# Altium PCB PCB1.PcbDoc
Units mil, origin at the board's own origin, x right, y up, seen from the top; angles counter-clockwise.
Board outline 2635 x 1850 mil, 2 copper layers (Top Layer, Bottom Layer); 36 components, 49 nets, 170 pads, 36 vias.
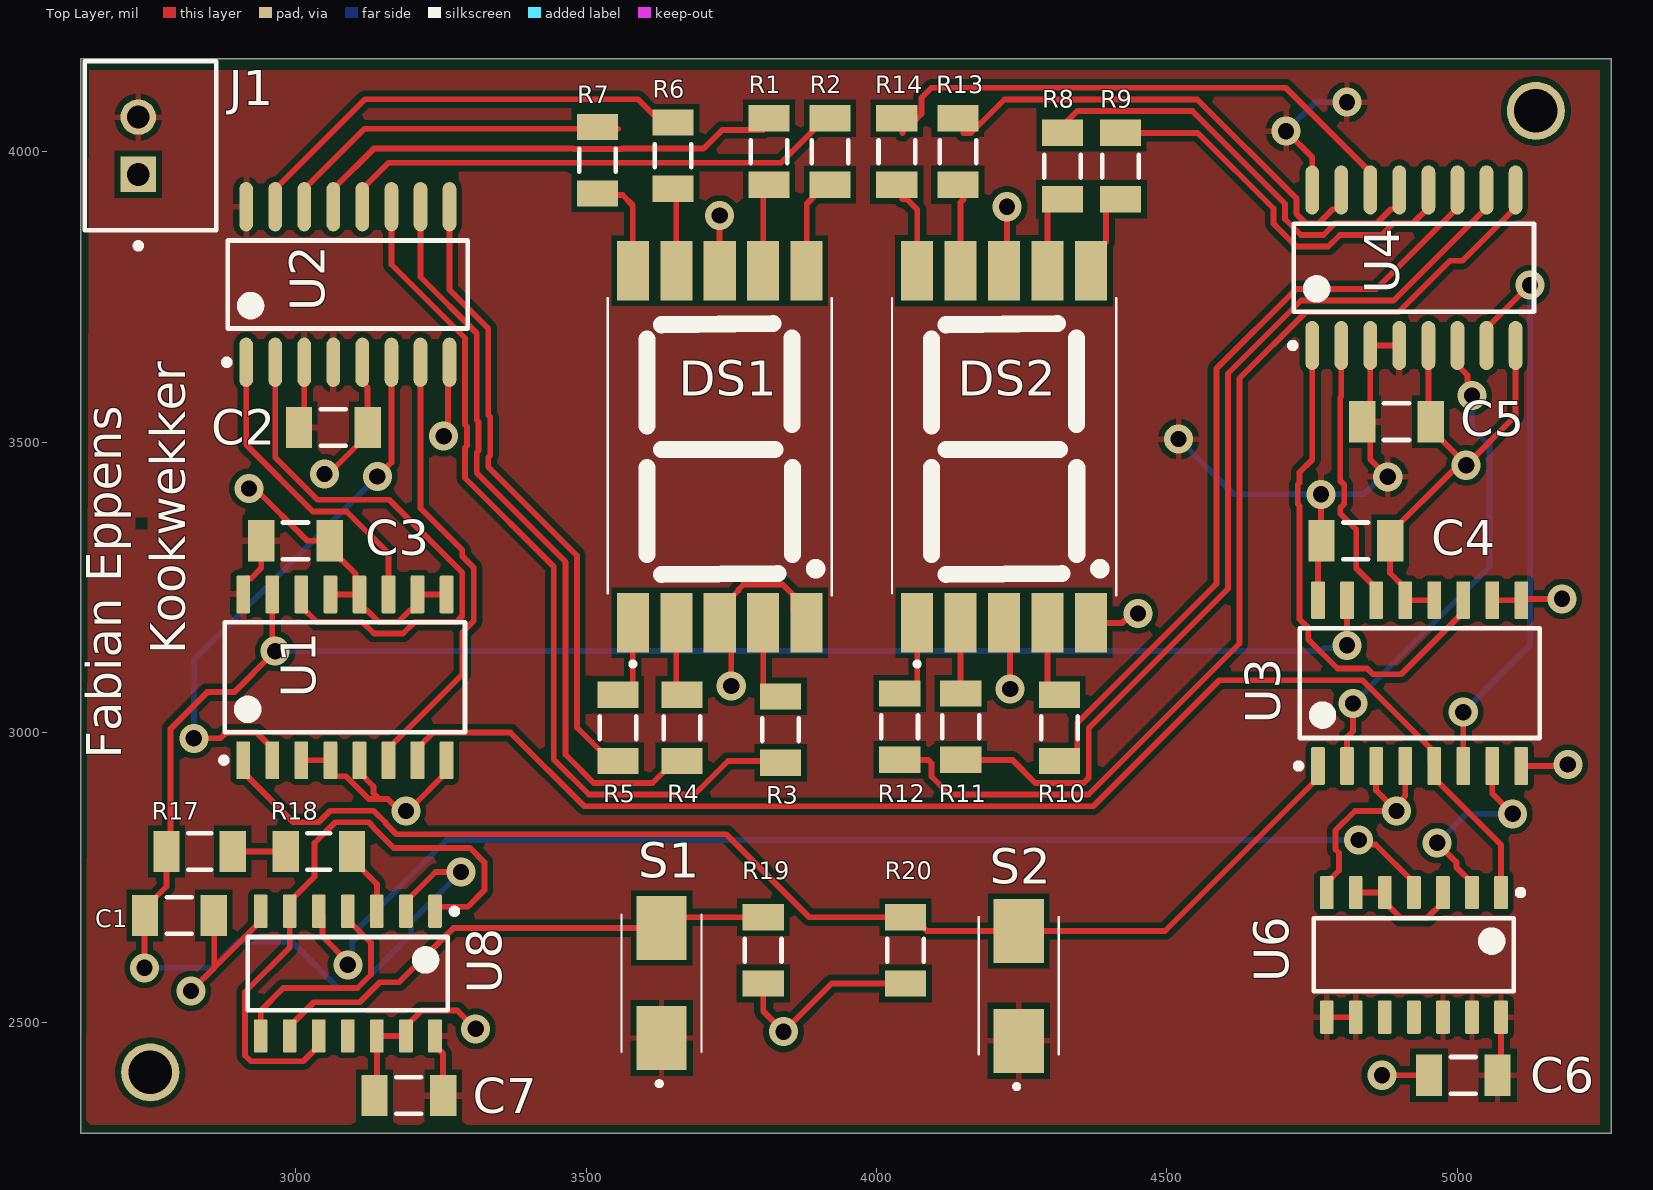
[diagram p0: Top Layer view]
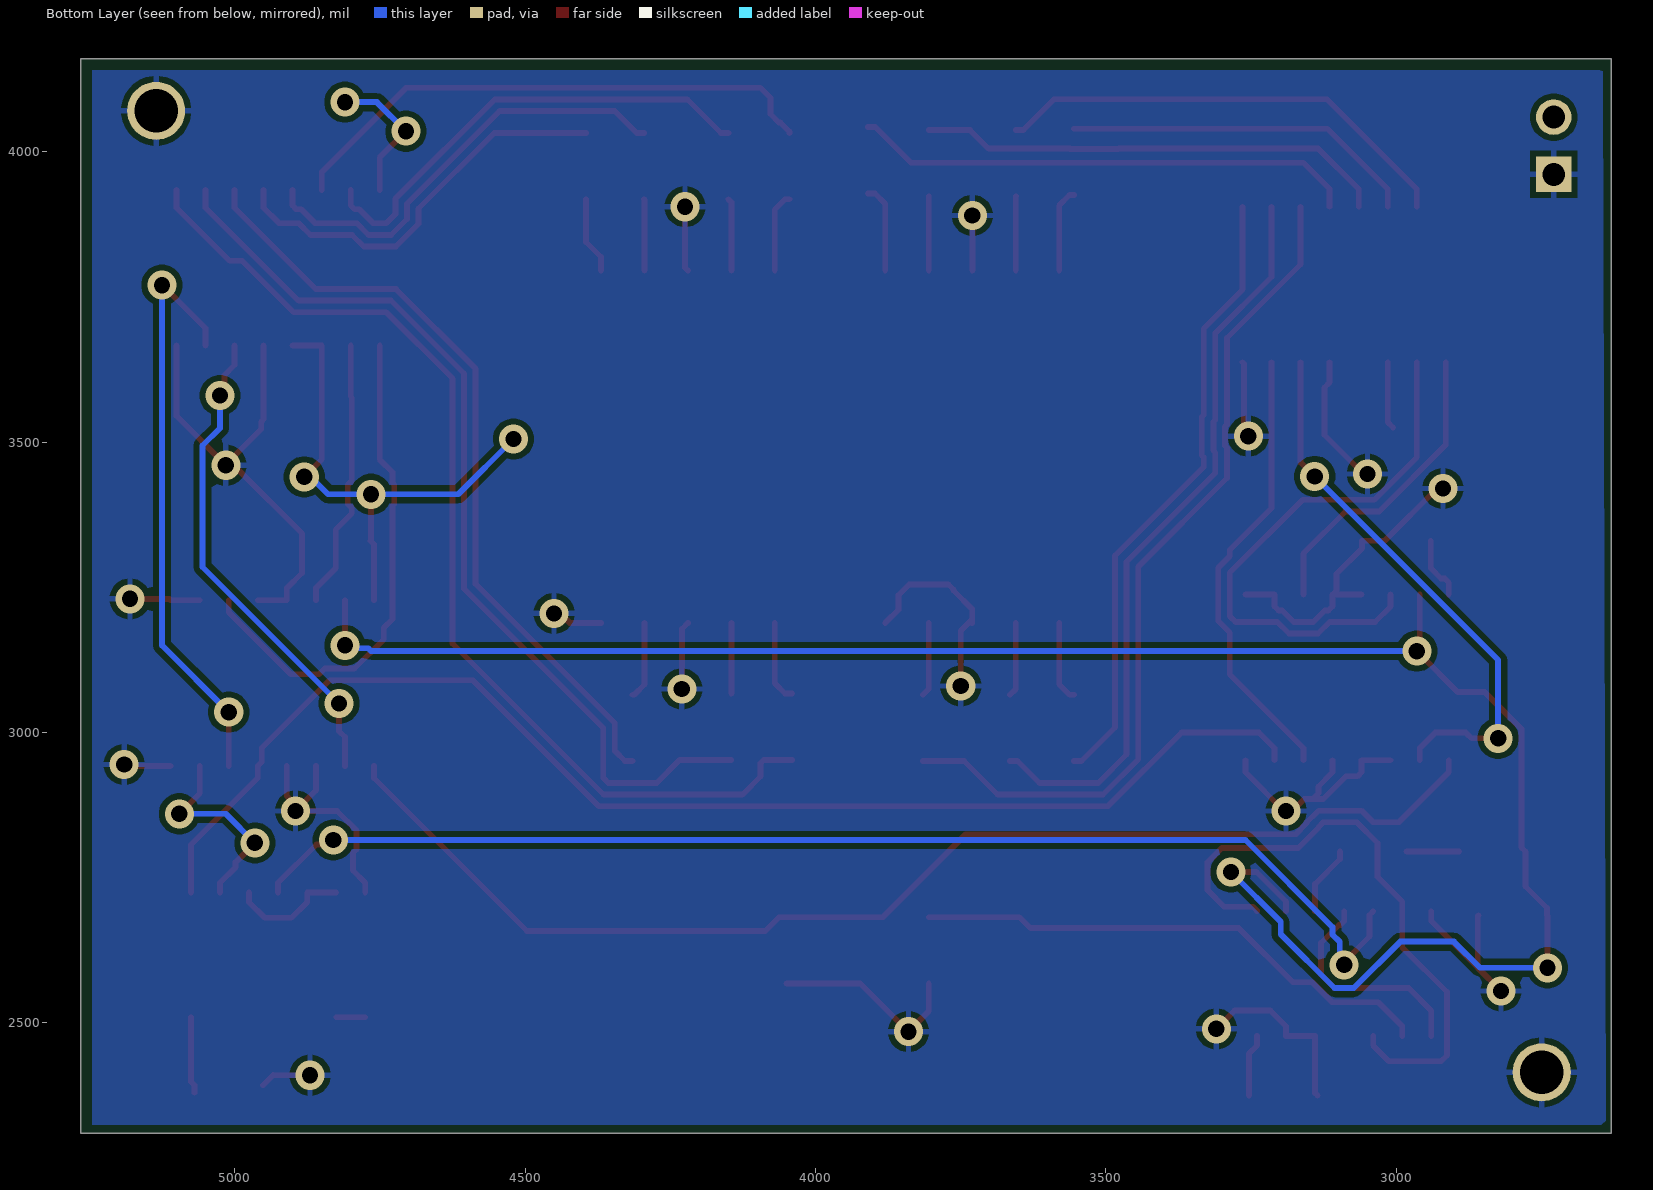
[diagram p1: Bottom Layer view, seen from below]

## Layer stack, top to bottom
Top Solder: solder mask 0.4, Solder Resist, Dk 3.5
Top Layer: signal copper 1.4
Dielectric 1: dielectric 12.6, FR-4, Dk 4.8
Bottom Layer: signal copper 1.4
Bottom Solder: solder mask 0.4, Solder Resist, Dk 3.5

## Board outline
2630,2310 2630,4160 5265,4160 5265,2310

## Design rules (kind name [scope] priority, off if disabled: settings)
Clearance [All] p1: gap=10 ignorepadtopadclearanceinfootprint=FALSE
PolygonConnect [All] p1: connectstyle=Relief reliefconductorwidth=10 reliefentries=4 polygonreliefangle="90 Angle" airgapwidth=10
RoutingVias [All] p1: holewidth=28 width=50 viastyle="Through Hole" minholewidth=28 minwidth=50 maxholewidth=28 maxwidth=50
SolderMaskExpansion [All] p1: expansion=4 istentingtop=FALSE
SupplyNets "Schematic Supply Nets_1" [InNet('Vdd')] p1: voltage=0.000
SupplyNets "Schematic Supply Nets" [InNet('GND')] p2: voltage=0.000
Width [All] p1: maxlimit=10 minlimit=10 preferedwidth=10
30 further rules are at their usual default settings.

## Classes and differential pairs
component class KookWekker: J1 U9
component class Logic: C1 C3 C4 C6 C7 R17 R18 R19 R20 S1 S2 U1 U3 U6 U8
component class Display: C2 C5 DS1 DS2 R1 R2 R3 R4 R5 R6 R7 R8 R9 R10 R11 R12 R13 R14 U2 U4

## Components (designator, comment, footprint, x,y, rotation, side; value= is the part's Value field where it differs from the comment)
C1 "100µF" C1206 2800,2685 r0 top
C2 "100nF" C1206 3065,3525 r180 top
C3 "100nF" C1206 3000,3330 r0 top
C4 "100nF" C1206 4825,3330 r0 top
C5 "100nF" C1206 4895,3535 r180 top
C6 "100nF" C1206 5010,2410 r0 top
C7 "100nF" C1206 3195,2375 r0 top
DS1 "HDSM-433C" HDSM433C 3730.2,3491.85 r0 top
DS2 "HDSM-433C" HDSM433C 4219.61,3491.85 r0 top
J1 "B2B-XH-A(LF)(SN)" FP-B2B-XH-A_LF_SN-MFG 2750,4010 r90 top
R1 "330" R1206 3815,4000 r270 top
R2 "330" R1206 3920,4000 r270 top
R3 "330" R1206 3835,3005 r90 top
R4 "330" R1206 3665,3007.91 r90 top
R5 "330" R1206 3555,3007.91 r90 top
R6 "330" R1206 3650,3992.91 r270 top
R7 "330" R1206 3520,3985 r270 top
R8 "330" R1206 4320,3975 r270 top
R9 "330" R1206 4420,3975 r270 top
R10 "330" R1206 4315,3007.91 r90 top
R11 "330" R1206 4145,3010 r90 top
R12 "330" R1206 4040,3010 r90 top
R13 "330" R1206 4140,4000 r270 top
R14 "330" R1206 4035,4000 r270 top
R17 "1K" R1206 2835,2795 r180 top
R18 "1K" R1206 3040,2795 r180 top
R19 "10K" R1206 3805,2625 r270 top
R20 "10K" R1206 4050,2625 r270 top
S1 "START" 1478731 3630,2555 r90 top
S2 "PRESET" 1478731 4245,2550 r90 top
U1 "CD4510BNSR" NS0016A_N 3085,3095 r90 top
U2 "CD4511BNSR" TI-NS16_N 3090,3771.14 r90 top
U3 "CD4510BNSR" NS0016A_N 4935,3085 r90 top
U4 "CD4511BNSR" TI-NS16_N 4925,3800 r90 top
U6 "CD4001" D0014A_N 4925,2617.28 r270 top
U8 "CD4093BM" D0014A_N 3090,2585 r270 top

## Footprints (in the part's own frame and the unit in brackets; to place one, negate y for a bottom-side part, rotate by r counter-clockwise, add the part's x,y. Pads: shape width x height; smd on the part's side, far side on the other; paste and mask are expansions set on the pad)
1478731 [mm]
  rect 2.8x2.2 smd: 1(-2.05,0) 2(2.75,0)
  silkscreen extent -4.15,-1.75 3.35,1.75, body extent -3.15,-1.75 3.65,1.75, height 5.2
C1206 [mm] "Chip Capacitor, Body 3.2x1.6mm, Height 1.7mm, IPC Medium Density"
  rect 1.15x1.8 smd: 1(-1.5,0) 2(1.5,0)
  silkscreen extent -0.55,-0.8 0.55,0.8, body extent -1.7,-0.9 1.7,0.9, height 1.7
D0014A_N [mm] "SOIC, 14-Leads, Body 8.75x4mm, Pitch 1.27mm, IPC Medium Density"
  rrect17% 1.45x0.6 smd: 1(-2.725,3.81) 2(-2.725,2.54) 3(-2.725,1.27) 4(-2.725,0) 5(-2.725,-1.27) 6(-2.725,-2.54) 7(-2.725,-3.81) 8(2.725,-3.81) 9(2.725,-2.54) 10(2.725,-1.27) 11(2.725,0) 12(2.725,1.27) 13(2.725,2.54) 14(2.725,3.81)
  silkscreen extent -2.85,-4.38 1.6,4.79, body extent -3.02,-4.32 3.02,4.32, height 1.59
FP-B2B-XH-A_LF_SN-MFG [mm]
  rect 1.55x1.55 hole 1 paste-2539.97 mask+0: 1(-1.25,0.525)
  round 1.55 hole 1 paste-2539.97 mask+0: 2(1.25,0.525)
  silkscreen extent -4.5,-2.88 3.7,2.88, body extent -3.8,-2.98 3.8,2.98, height 0.25
HDSM433C [mm]
  rect 1.4x2.6 smd: 1(-3.8,-7.7) 2(-1.9,-7.7) 3(0,-7.7) 4(1.9,-7.7) 5(3.8,-7.7) 6(3.8,7.7) 7(1.9,7.7) 8(0,7.7) 9(-1.9,7.7) 10(-3.8,7.7)
  silkscreen extent -4.9,-9.6 4.9,6.5, body extent -4.95,-6.48 4.95,6.48, height 3.75
NS0016A_N [mm] "SOIC,16-Leads,Body 10.5x5.6mm,Pitch 1.27mm,IPC Medium Density"
  rrect17% 1.65x0.6 smd: 1(-3.625,4.445) 2(-3.625,3.175) 3(-3.625,1.905) 4(-3.625,0.635) 5(-3.625,-0.635) 6(-3.625,-1.905) 7(-3.625,-3.175) 8(-3.625,-4.445) 9(3.625,-4.445) 10(3.625,-3.175) 11(3.625,-1.905) 12(3.625,-0.635) 13(3.625,0.635) 14(3.625,1.905) 15(3.625,3.175) 16(3.625,4.445)
  silkscreen extent -3.75,-5.25 2.4,5.42, body extent -2.8,-5.25 2.8,5.25, height 2
R1206 [mm] "Chip Resistor, Body 3.2x1.6mm, IPC Medium Density"
  rect 1.15x1.8 smd: 1(-1.45,0) 2(1.45,0)
  silkscreen extent -0.5,-0.8 0.5,0.8, body extent -1.67,-0.87 1.67,0.87, height 0.75
TI-NS16_N [mm] "SOP, 16-Leads, Body 10.2x5.3mm, Pitch 1.27mm, IPC Medium Density"
  oval 2.15x0.6 smd: 1(-3.4,4.445) 2(-3.4,3.175) 3(-3.4,1.905) 4(-3.4,0.635) 5(-3.4,-0.635) 6(-3.4,-1.905) 7(-3.4,-3.175) 8(-3.4,-4.445) 9(3.4,-4.445) 10(3.4,-3.175) 11(3.4,-1.905) 12(3.4,-0.635) 13(3.4,0.635) 14(3.4,1.905) 15(3.4,3.175) 16(3.4,4.445)
  silkscreen extent -3.52,-5.25 1.92,5.42, body extent -2.8,-5.25 2.8,5.25, height 2

## Part data
C1 C2 C3 C4 C5 C6 C7: library part Capacitor_1206, "SMD Capacitor 1206", LatestRevisionDate=03-11-2016, LatestRevisionNote=Creation, PackageDescription="Chip Capacitor, Body 3.2x1.6mm, Height 1.7mm, IPC Medium Density", PackageReference=C1206, Published=03-11-2016, Publisher=Windesheim
DS1 DS2: "Display", Manufacturer_Name="Avago Technologies", Mouser Part Number=630-HDSM-433C, RS Part Number=1783057, Datasheet Link=https://docs.broadcom.com/docs/AV02-0708EN, Height=4mm, Manufacturer_Part_Number=HDSM-433C, Mouser Price/Stock=https://www.mouser.com/Search/Refine.aspx?Keyword=630-HDSM-433C, RS Price/Stock=http://uk.rs-online.com/web/p/products/1783057
J1: library part CMP-2000-05888-3, "CONN HEADER VERT 2POS 2.5MM", Color=Natural, Contact Resistance=20mR, Current Rating=3A, Housing Color=White, Insulation Resistance=1GR, Max Operating Temperature=85°C, Max Voltage Rating (AC)=250V, Min Operating Temperature=-25°C, Connector Type="Male Pin", Contact Material=Brass, Contact Plating=Tin, Contact Type="Male Pin", Depth=5.75mm, Fastening Type=Detent, Housing Material=Polyamide, Lead Free="Lead Free", Lead Pitch=2.5mm, Length=7.4mm, Max Current Rating=3A, Max Voltage Rating (DC)=250V, Mount="Through Hole", Number of Contacts=2, Number of Positions=2, Number of Rows=1, Orientation=Straight, Packaging=Bulk, Pitch=2.5mm, REACH SVHC="No SVHC", Series=XH, Termination=Solder, Voltage Rating=250V, Voltage Rating (AC)=250V, Wire/Cable Gauge=22AWG
R1 R2 R3 R4 R5 R6 R7 R8 R9 R10 R11 R12 R13 R14 R17 R18 R19 R20: library part Resistor_1206, "SMD Resistor 1206", LatestRevisionDate=03-11-2016, LatestRevisionNote=Creation, PackageDescription="Chip Resistor, Body 3.2x1.6mm, IPC Medium Density", PackageReference=R1206, Published=03-11-2016, Publisher=Windesheim
S1 S2: library part Switch, "Switch", Manufacturer_Name="TE Connectivity", Manufacturer_Part_Number=147873-1, Mouser Part Number=506-147873-1, Datasheet Link=https://componentsearchengine.com/Datasheets/1/147873-1.pdf, Height=5mm, Mouser Price/Stock=https://www.mouser.com/Search/Refine.aspx?Keyword=506-147873-1
U1 U3: "CMOS Presettable BCD Up/Down Counter, NS0016A, LARGE T&R", F @ Nom Voltage(Max)(Mhz)=8, Generic Part Number=CD4510B, ICC @ Nom Voltage(Max)(mA)=0.03, Manufacturer="Texas Instruments", Operating Temperature Range(C)="-55 to 125", Rating=Catalog, tpd @ Nom Voltage(Max)(ns)=200, Voltage(Nom)(V)=5,10,15, Bits(#)=4, DatasheetVersion=SCHS071B, Function=Counter, Input Type=CMOS, Inputs=1, Output Drive (IOL/IOH)(Max)(mA)=1.5/-1.5, Output Type=CMOS, PackageReference=NS0016A, Schmitt Trigger=No, Technology Family=CD4000, Type=Other, VCC(Max)(V)=18, VCC(Min)(V)=3
U2 U4: "CMOS BCD-to-7-Segment LED Latch / Decoder / Driver, 3 to 18 V, -55 to 125 degC, 16-pin SOP (NS16), Green (RoHS & no Sb/Br)", Manufacturer="Texas Instruments", Rating=Military, ComponentLink1Description="Manufacturer URL", ComponentLink1URL=http://www.ti.com/, ComponentLink2Description=Datasheet, ComponentLink2URL=http://www.ti.com/general/docs/lit/getliterature.tsp?genericPartNumber=CD4511B&fileType=pdf, ComponentLink3Description="Package Specification", ComponentLink3URL=http://www.ti.com/litv/pdf/msop002a, DatasheetVersion=SCHS072B, Eco-Plan="Green (RoHS & no Sb/Br)", Mounting Technology="Surface Mount", PackageDescription="16-Pin Plastic Small Outline, Body 10.20 x 5.30 mm, Pitch 1.27 mm", PackageReference=NS16, PackageVersion=4040062/C, PartNumber=CD4511BNSR, SubFamily="Discrete Segment LED Driver", Vin(Max)(V)=18, Vin(Min)(V)=3
U6: "CMOS Quad 2-Input NOR Schmitt Triggers, D0014A, TUBE", F @ Nom Voltage(Max)(Mhz)=8, Generic Part Number=CD4093B, ICC @ Nom Voltage(Max)(mA)=0.06, Manufacturer="Texas Instruments", Operating Temperature Range(C)="-55 to 125", Rating=Catalog, Voltage(Nom)(V)=10, Bits(#)=4, Code_JEDEC=MS-012, DatasheetVersion=SCHS115D, Input Type=CMOS, Output Drive (IOL/IOH)(Max)(mA)=1.5/-1.5, Output Type=CMOS, PackageReference=D0014A, Schmitt Trigger=Yes, Technology Family=CD4000, VCC(Max)(V)=18, VCC(Min)(V)=3
U8: "CMOS Quad 2-Input NAND Schmitt Triggers, D0014A, TUBE", F @ Nom Voltage(Max)(Mhz)=8, Generic Part Number=CD4093B, ICC @ Nom Voltage(Max)(mA)=0.06, Manufacturer="Texas Instruments", Operating Temperature Range(C)="-55 to 125", Rating=Catalog, Voltage(Nom)(V)=10, Bits(#)=4, Code_JEDEC=MS-012, DatasheetVersion=SCHS115D, Input Type=CMOS, Output Drive (IOL/IOH)(Max)(mA)=1.5/-1.5, Output Type=CMOS, PackageReference=D0014A, Schmitt Trigger=Yes, Technology Family=CD4000, VCC(Max)(V)=18, VCC(Min)(V)=3

## Free pads (board coordinates)
  round 100 hole 75: MNT(2750,2415) MNT(5135,4070)

## Via types
v1: diameter 50, hole 28, Top Layer to Bottom Layer, 36 vias

## Nets (pads, with @x,y where several pads share a name; then routed paths per layer and width w, separated by ;. In a path a pad name is that pad's centre, name@x,y a point inside that pad or via, vN(x,y) a via of type N, cw(c..) or ccw(c..) an arc to the next point about the centre after c; other vN are vias at no path point)
CarryM: U3.7 U6.2 | length 357.8
  Top Layer w10: v1(4965,2810) 4998.13,2776.87 4998.13,2768.17 5025,2741.3 U6.2 ; U3.7 5060,2895 v1(5095,2860)
  Bottom Layer w10: v1(4965,2810) 5015,2860 v1(5095,2860)
CarryOUT: U1.7 U3.5 U6.1 | length 2264.8
  Top Layer w10: U1.7 3210,2972.95 3236.81,2999.76 3370.21,2999.76 3496.79,2873.19 4373.21,2873.19 4590.03,3090 4836.57,3090 4953.19,2973.38 4953.19,2949.09 U3.5 4960,2921.61 5075,2806.61 U6.1
Clock: C1.1 R17.2 U1.15 U3.15 U8.2 | length 3513.1
  Top Layer w10: v1(2740,2595) 2740,2684.06 C1.1 2740.94,2697.8 2777.91,2734.76 R17.2 2785,2802.09 2785,3006.57 2847.89,3069.46 2894.46,3069.46 2960,3135 U1.15 ; U8.2 3190,2709.02 3240.98,2760 v1(3285,2760) ; v1(4810,3150) U3.15
  Bottom Layer w10: v1(2740,2595) 2856.2,2595 2901.2,2640 2993.43,2640 3073.43,2560 3106.57,2560 3199.32,2652.75 3199.32,2674.32 v1(3285,2760) ; v1(2965,3140) 2965.12,3140.12 4765,3140.12 4770,3145.12 4805.12,3145.12 v1(4810,3150)
GND: C1.2 C2.1 C3.2 C4.2 C5.1 C6.1 C7.1 DS1.3 DS1.5 DS1.8 DS2.3 DS2.5 DS2.8 J1.1 pad.MNT R19.2 R20.2 U1.3 U1.4 U1.5 U1.8 U1.9 U1.10 U1.12 U1.13 U2.5 U2.8 U3.3 U3.4 U3.8 U3.9 U3.10 U3.12 U3.13 U4.5 U4.8 U6.7 U8.7 U8.12 U8.13 | length 4626.2
  Top Layer w10: v1(2820,2555) 2860,2595 2860,2595.55 ; C1.2 2860,2684.06 2860,2595.55 ; v1(2920,3420) 2930.23,3420 3020.23,3330 C3.2 3059.06,3317.2 3103.19,3273.07 3103.19,3244.53 U1.12 ; U8.7 2940,2675.55 2860,2595.55 ; U1.3 U1.4 3060,2931.61 3066.81,2924.8 3086.81,2924.8 3126.18,2885.43 3143.54,2885.43 3158.74,2885.43 3179.18,2865 3193.39,2865 3260,2931.61 U1.8 ; v1(3050,3445) 3056.85,3445 3124.06,3512.2 C2.1 3124.06,3594.03 3115,3603.09 U2.5 ; U1.13 U1.12 ; U1.5 3110,2931.61 3134.37,2907.24 3134.37,2895.63 3143.54,2886.46 ; C7.1 3140,2379.06 U8.12 U8.13 3190,2494.45 3216.81,2521.26 3278.74,2521.26 v1(3310,2490) ; v1(3255,3510) 3262.39,3517.39 3262.39,3634.68 U2.8 ; U1.9 U1.10 3210,3217.05 3203.19,3210.24 3196.85,3210.24 3176.85,3190.24 3143.15,3190.24 3123.15,3210.24 3116.81,3210.24 3110,3217.05 U1.12 ; v1(3730,3890) 3730,3795.2 DS1.8 ; DS1.3 DS1.3@3730.2,3194.8 ; v1(3750,3080) 3750,3175 DS1.3@3730.2,3194.8 ; R19.2 3805,2520 v1(3840,2485) 3922.91,2567.91 R20.2 ; DS1.5 3857.24,3211.26 3857.24,3236.41 3838.77,3254.88 3771.23,3254.88 3762.44,3246.1 3762.44,3244.57 3730.2,3212.32 DS1.3@3730.2,3194.8 ; DS2.3 4230,3178.31 v1(4230,3075) ; DS2.8 4224.57,3799.96 v1(4224.57,3905) ; DS2.5 4422.88,3188.7 4439.18,3205 v1(4450,3205) ; U6.7 4775,2741.3 4795.95,2762.25 4795.95,2792.48 4790,2798.43 4790,2831.57 4823.43,2865 v1(4895,2865) ; U3.3 4860,2900 v1(4895,2865) ; v1(4870,2410) 4933.74,2410 4950.94,2392.8 C6.1@4933.31,2410.43 ; U3.4 4910,2890.82 4895,2875.82 v1(4895,2865) ; U4.5 4950,3539.05 C5.1 4954.06,3522.2 5015,3461.26 v1(5015,3460) ; U3.12 U3.13 4910,3248.39 4884.06,3274.33 4884.06,3342.8 4993.61,3452.35 5007.35,3452.35 v1(5015,3460) ; U3.10 U3.9 5112.28,3230 v1(5180,3230) ; U4.8 5100,3545 v1(5015,3460) ; U3.8 5182.28,2942.28 5185,2945 v1(5190,2945)
  Bottom Layer w10: v1(3255,3510) 3255,3500 v1@3265,3510
  other v1: 3190,2865
NetDS1_1: DS1.1 R5.2 | length 139
  Top Layer w10: R5.2 3562.95,3065 3580.59,3082.64 DS1.1
NetDS1_2: DS1.2 R4.2 | length 127.7
  Top Layer w10: DS1.2 3655.39,3074.61 R4.2
NetDS1_4: DS1.4 R3.2 | length 127.8
  Top Layer w10: DS1.4 3805,3075 R3.2@3815,3065
NetDS1_6: DS1.6 R2.2 | length 152.8
  Top Layer w10: DS1.6 3879.8,3910.28 3897.44,3927.91 R2.2@3910,3927.91
NetDS1_7: DS1.7 R1.2 | length 127.9
  Top Layer w10: DS1.7 R1.2@3805,3922.91
NetDS1_9: DS1.9 R6.2 | length 128.1
  Top Layer w10: R6.2@3655,3922.91 3655.39,3922.52 DS1.9
NetDS1_10: DS1.10 R7.2 | length 145.3
  Top Layer w10: R7.2@3555,3925 3562.95,3925 3580.59,3907.36 DS1.10
NetDS2_1: DS2.1 R12.2 | length 141.3
  Top Layer w10: R12.2 4052.36,3067.09 4070,3084.72 DS2.1
NetDS2_2: DS2.2 R11.2 | length 121.7
  Top Layer w10: DS2.2 4144.8,3067.28 R11.2
NetDS2_4: DS2.4 R10.2 | length 134
  Top Layer w10: DS2.4 4294.41,3082.64 4312.05,3065 R10.2
NetDS2_6: DS2.6 R9.2 | length 133.6
  Top Layer w10: DS2.6 4369.21,3818.62 4395,3844.41 R9.2@4395,3917.91
NetDS2_7: DS2.7 R8.2 | length 123.2
  Top Layer w10: DS2.7 4294.41,3917.32 R8.2@4295,3917.91
NetDS2_9: DS2.9 R13.2 | length 125.1
  Top Layer w10: DS2.9 4144.8,3912.72 4150,3917.91
NetDS2_10: DS2.10 R14.2 | length 137.6
  Top Layer w10: 4045,3917.91 4052.36,3917.91 4070,3900.28 DS2.10
NetR1_1: R1.1 U2.13 | length 813
  Top Layer w10: U2.13 3065,3935.51 3134.49,4005 3477.8,4005 3478.35,4004.45 3561.65,4004.45 3562.2,4005 3702.2,4005 3734.28,4037.09 R1.1@3805,4037.09
NetR2_1: R2.1 U2.12 | length 869.7
  Top Layer w10: U2.12 3115,3935.51 3160.04,3980.55 3835.67,3980.55 3897.2,4042.09 R2.1@3910,4042.09
NetR3_1: R3.1 U2.11 | length 1489.1
  Top Layer w10: U2.11 3165,3805.71 3291.81,3678.9 3291.81,3529.76 3295,3526.57 3295,3493.43 3291.81,3490.24 3291.81,3438.19 3444.57,3285.43 3444.57,2953.69 3505.07,2893.19 3686.65,2893.19 3744.28,2950.83 R3.1@3815,2950.83
NetR4_1: R4.1 U2.10 | length 1285.3
  Top Layer w10: U2.10 3215,3784 3311.81,3687.18 3311.81,3538.04 3315,3534.85 3315,3485.15 3311.81,3481.96 3311.81,3446.47 3464.57,3293.72 3464.57,2961.98 3513.35,2913.19 3614.57,2913.19 3652.2,2950.83 R4.1
NetR5_1: R5.1 U2.9 | length 1084.4
  Top Layer w10: U2.9 3265,3762.28 3331.81,3695.47 3331.81,3546.33 3335,3543.14 3335,3476.86 3331.81,3473.67 3331.81,3457.19 3484.57,3304.43 3484.57,3008.46 3542.2,2950.83 R5.1
NetR6_1: R6.1 U2.15 | length 806.4
  Top Layer w10: U2.15 2965,3935.51 3119.49,4090 3589.29,4090 3642.2,4037.09 R6.1@3655,4037.09
NetR7_1: R7.1 U2.14 | length 613.4
  Top Layer w10: U2.14 3015,3935.51 3118.66,4039.17 3520,4039.17 R7.1@3555,4039.17
NetR8_1: R8.1 U4.13 | length 772
  Top Layer w10: R8.1@4295,4032.09 4307.8,4032.09 4345.43,4069.72 4543.71,4069.72 4703.19,3910.24 4703.19,3883.96 4730.61,3856.54 4769.39,3856.54 4789.39,3876.54 4861.11,3876.54 4885.31,3900.74 4893.71,3900.74 4900,3907.03 U4.13
NetR9_1: R9.1 U4.12 | length 709.6
  Top Layer w10: R9.1@4395,4032.09 4553.06,4032.09 4683.19,3901.96 4683.19,3875.67 4722.33,3836.54 4777.67,3836.54 4797.67,3856.54 4869.39,3856.54 4889.39,3876.54 4923.19,3876.54 4950,3903.35 U4.12
NetR10_1: R10.1 U4.11 | length 1355
  Top Layer w10: R10.1 4327.8,2950.83 4345.43,2968.46 4345.43,3016.15 4585,3255.72 4585,3626.14 4722.33,3763.46 4860.12,3763.46 5000,3903.35 U4.11
NetR11_1: R11.1 U4.10 | length 1629.4
  Top Layer w10: R11.1 4233.63,2952.91 4273.35,2913.19 4356.65,2913.19 4365.43,2921.98 4365.43,3007.86 4605,3247.43 4605,3383.38 4605,3617.85 4730.61,3743.46 4869.39,3743.46 4890.12,3743.46 5050,3903.35 U4.10
NetR12_1: R12.1 U4.9 | length 1814.4
  Top Layer w10: R12.1 4088.71,2952.91 4094.57,2947.06 4094.57,2924.06 4125.44,2893.19 4364.93,2893.19 4625,3153.26 4625,3609.57 4738.9,3723.46 4861.11,3723.46 4898.4,3723.46 4987.04,3812.1 5008.76,3812.1 5100,3903.35 U4.9
NetR13_1: R13.1 U4.15 | length 817
  Top Layer w10: 4150,4032.09 4162.8,4032.09 4220.43,4089.72 4551.99,4089.72 4723.19,3918.53 4723.19,3892.24 4738.89,3876.54 4761.11,3876.54 4785.31,3900.74 4793.71,3900.74 4800,3907.03 U4.15
NetR14_1: R14.1 U4.14 | length 945.5
  Top Layer w10: 4045,4032.09 4045,4034.29 4060.43,4049.72 4062.64,4049.72 4077.64,4064.72 4077.64,4092.64 4094.72,4109.72 4704.65,4109.72 4850,3964.37 U4.14
NetR17_1: R17.1 R18.2 | length 90.8
  Top Layer w10: R17.1 R18.2
NetR18_1: R18.1 U8.3 | length 120.5
  Top Layer w10: R18.1 3097.09,2782.2 3140,2739.29 U8.3
NetU1_2: U1.2 U2.6 | length 958.9
  Top Layer w10: v1(2825,2990) 2870.82,2990 2880.59,2999.76 2933.19,2999.76 2960,2972.95 U1.2 ; v1(3140.74,3440.74) 3165,3465 U2.6
  Bottom Layer w10: v1(2825,2990) 2825,3125 v1(3140.74,3440.74)
NetU1_6: U1.6 U2.7 | length 783.8
  Top Layer w10: U1.6 3160,2972.95 3286.81,3099.76 3286.81,3171.92 3306.81,3191.92 3306.81,3283.52 3286.81,3303.52 3286.81,3314.22 3215,3386.03 U2.7
NetU1_11: U1.11 U2.1 | length 535.1
  Top Layer w10: U2.1 2915,3495.15 3029.71,3380.43 3087.91,3380.43 3160,3308.34 U1.11
NetU1_14: U1.14 U2.2 | length 972.1
  Top Layer w10: U2.2 2965,3473.43 3037.69,3400.74 3161.31,3400.74 3286.81,3275.23 3286.81,3200.2 3276.85,3190.24 3205.13,3190.24 3185.13,3170.24 3134.87,3170.24 3114.87,3190.24 3036.81,3190.24 3010,3217.05 U1.14
NetU3_2: U3.2 U4.6 | length 848.1
  Top Layer w10: U3.2 4810,2992.24 4820,3002.24 v1(4820,3050) ; U4.6 5000,3632.41 5017.35,3615.06 5017.35,3587.65 v1(5025,3580)
  Bottom Layer w10: v1(4820,3050) 5055,3285 5055,3493.8 5025,3523.8 v1(5025,3580)
NetU3_6: U3.6 U4.7 | length 1010.8
  Top Layer w10: U3.6 v1(5010,3035) ; U4.7 5050,3695.83 5124.17,3770 v1(5125,3770)
  Bottom Layer w10: v1(5010,3035) 5125,3150 v1(5125,3770)
NetU3_11: U3.11 U4.1 | length 880.4
  Top Layer w10: U4.1 4750,3469.69 4728.31,3448 4728.31,3429.88 4725,3426.57 4725,3393.43 4728.31,3390.12 4728.31,3195.08 4743.15,3180.24 4743.15,3160.28 4793.43,3110 4844.85,3110 4854.62,3100.24 4903.19,3100.24 5010,3207.05 U3.11
NetU3_14: U3.14 U4.2 | length 470.2
  Top Layer w10: U4.2 4800,3578.34 4798.31,3576.65 4798.31,3433.26 4805,3426.57 4805,3393.43 4798.31,3386.74 4798.31,3376.92 4825.75,3349.48 4825.75,3282.64 4860,3248.39 U3.14
NetU6_3: U6.3 U6.5 U6.6 | length 205.7
  Top Layer w10: U6.6 U6.5 4875,2707.83 4901.81,2681.02 4948.19,2681.02 4975,2707.83 U6.3
NetU6_4: U6.4 U8.5 | length 2110.7
  Top Layer w10: U8.5 3046.26,2686.02 3046.26,2648.74 3090,2605 v1(3090,2600) ; v1(4830,2815) 4837.65,2807.35 4858.95,2807.35 4925,2741.3 U6.4
  Bottom Layer w10: v1(3090,2600) 3097.65,2607.65 3097.65,2639.74 3109.95,2652.03 3109.95,2664.95 3260,2815 v1(4830,2815)
NetU8_4: U8.4 U8.8 | length 386.1
  Top Layer w10: U8.8 2940,2521.26 2978.74,2560 3085.31,2560 3106.57,2560 3130,2583.43 3130,2604.69 3130,2637.83 3099.09,2668.74 3096.81,2668.74 3090,2675.55 U8.4
PRESET: R20.1 S2.2 U1.1 U3.1 | length 2130.9
  Top Layer w10: U1.1 2910,2931.61 2996.18,2845.43 3039.95,2845.43 3059.95,2865.43 3134.22,2865.43 3154.72,2844.93 3154.72,2843.71 3173.43,2825 3741.37,2825 3884.28,2682.09 R20.1 4062.8,2682.09 4086.61,2658.27 S2.2 4496.65,2658.27 4760,2921.61 U3.1
START: R19.1 S1.2 U8.9 | length 909.5
  Top Layer w10: U8.9 2990,2494.45 3031.18,2535.63 3110.48,2535.63 3144.85,2570 3178.11,2570 3271.38,2663.27 S1.2 3648.82,2682.09 R19.1
STOP: U8.1 U8.6 U8.10 | length 1059
  Top Layer w10: U8.10 3040,2460.98 3013.19,2434.17 2923.15,2434.17 2913.19,2444.14 2913.19,2553.19 2990,2630 2990,2709.02 3032.52,2751.54 3032.52,2809.72 3068.24,2845.43 3125.94,2845.43 3134.72,2836.65 3134.72,2835.42 3169.11,2801.04 3300.53,2801.04 3325,2776.57 3325,2728.4 3296.67,2700.07 3246.81,2700.07 3240,2693.26 U8.1
Vdd: C2.2 C3.1 C4.1 C5.2 C6.2 C7.2 J1.2 S1.1 S2.1 U1.16 U2.3 U2.4 U2.16 U3.16 U4.3 U4.4 U4.16 U6.8 U6.9 U6.12 U6.13 U6.14 U8.14 | length 1646.8
  Top Layer w10: U1.16 2910,3258.39 2916.81,3265.2 2923.15,3265.2 2940.94,3282.99 C3.1 ; C2.2 3015,3534.05 U2.3 ; U8.14 3240,2460.98 3254.06,2446.93 C7.2 ; v1(4705,4035) 4750,3990 U4.16 ; U3.16 4760,3324.06 C4.1 4765,3330.95 v1(4765,3410) ; U6.8 U6.9 ; v1(4880,3440) 4850,3470 U4.3 U4.4 ; C6.2@5069.06,2380 5069.06,2392.8 5075,2398.74 U6.14
  Bottom Layer w10: v1(4520,3505) 4615,3410 v1(4765,3410) 4839.18,3410 4869.18,3440 v1(4880,3440) ; v1(4705,4035) 4755,4085 v1(4810,4085)
pads on no net: U6.10 U6.11 U8.11

## Polygon pours and split planes (outlines as drawn)
GND on Bottom Layer "GND_L02_P000" (solid, pour order 0): 2645,4145 2650,4140 5245,4140 5245,2325 2640,2325
Vdd on Top Layer "VDD_L01_P001" (solid, pour order 1): 2645,4140 5245,4140 5245,2325 2645,2325 2640,2330

## Other copper
Top Layer:

## Silkscreen, mask and mechanical layers (free items; w line width, h text height)
Top Overlay:
  text "Kookwekker" at 2810,3135 h60 r90
  text "Fabian Eppens" at 2700.01,2955 h60 r90
Mechanical 1:
  the board outline again, w10